# Altium PCB 采集卡.PcbDoc (part 1 of 2)
Units mil, origin at the board's own origin, x right, y up, seen from the top; angles counter-clockwise.
Board outline 5354.33 x 3248.82 mil, 2 copper layers (Top Layer, Bottom Layer); 90 components, 107 nets, 465 pads, 100 vias.
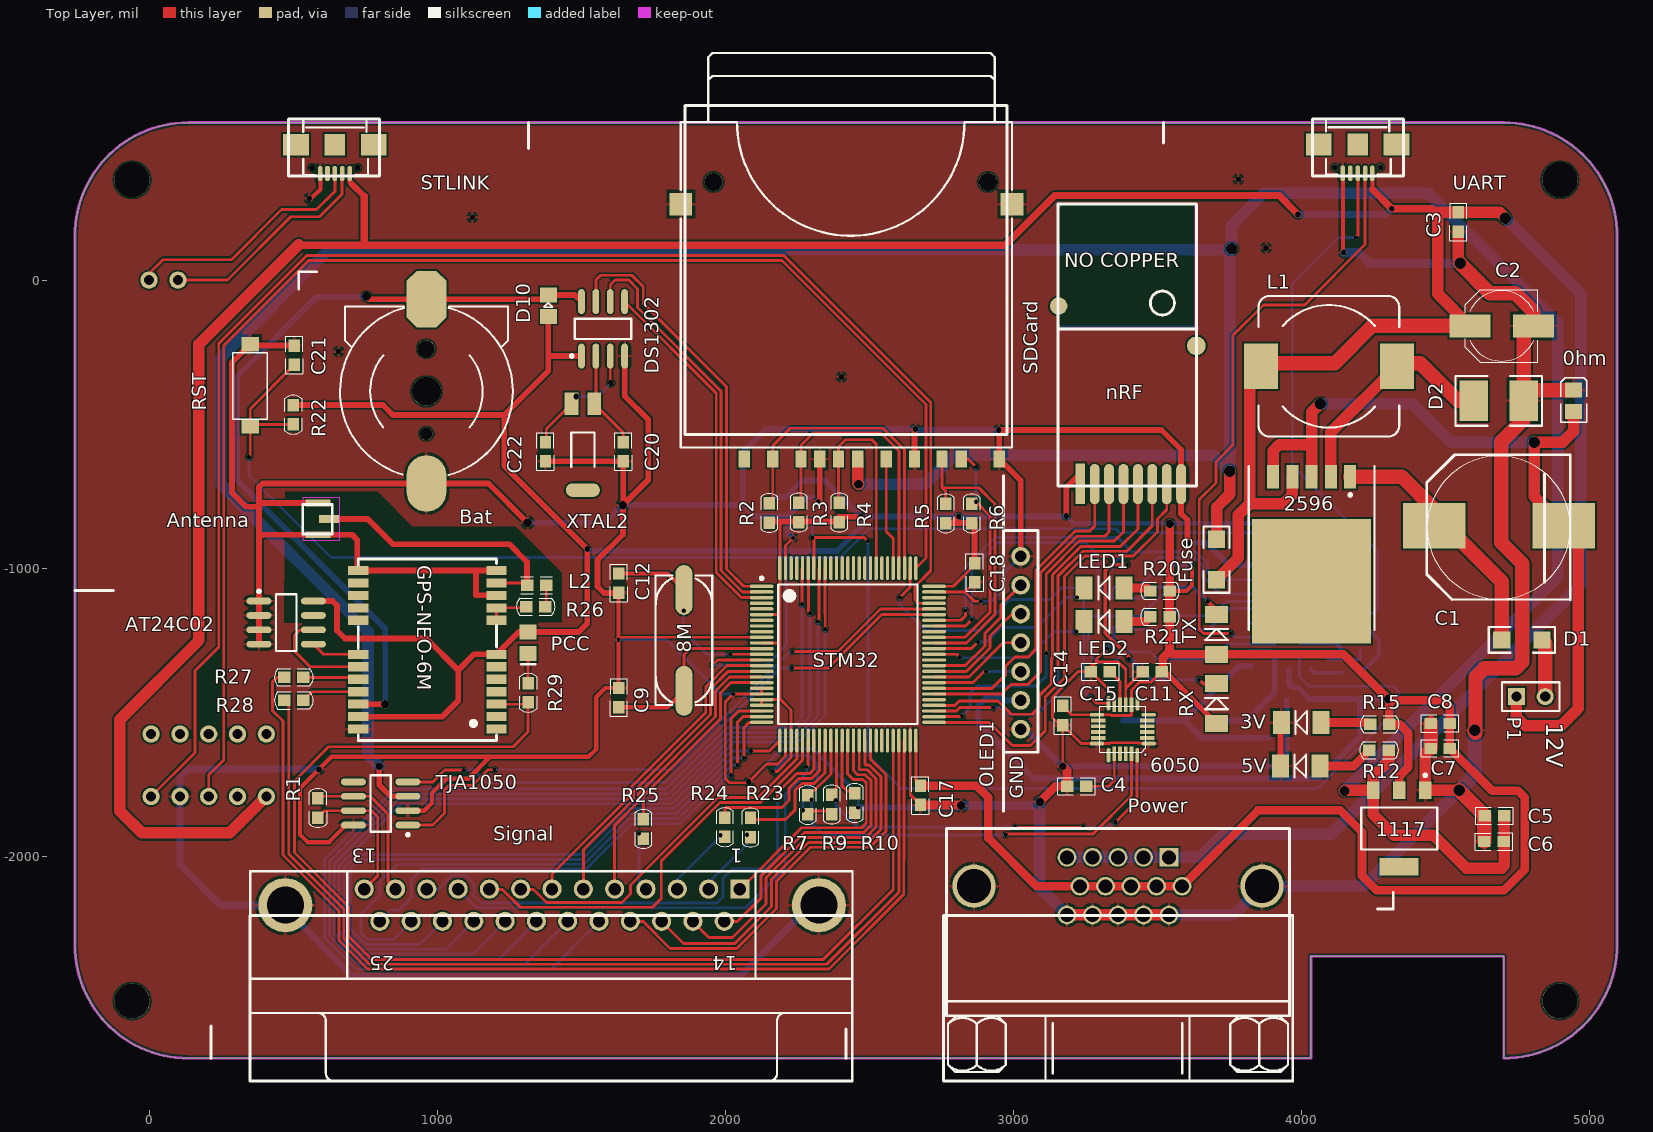
[diagram p0: Top Layer view]
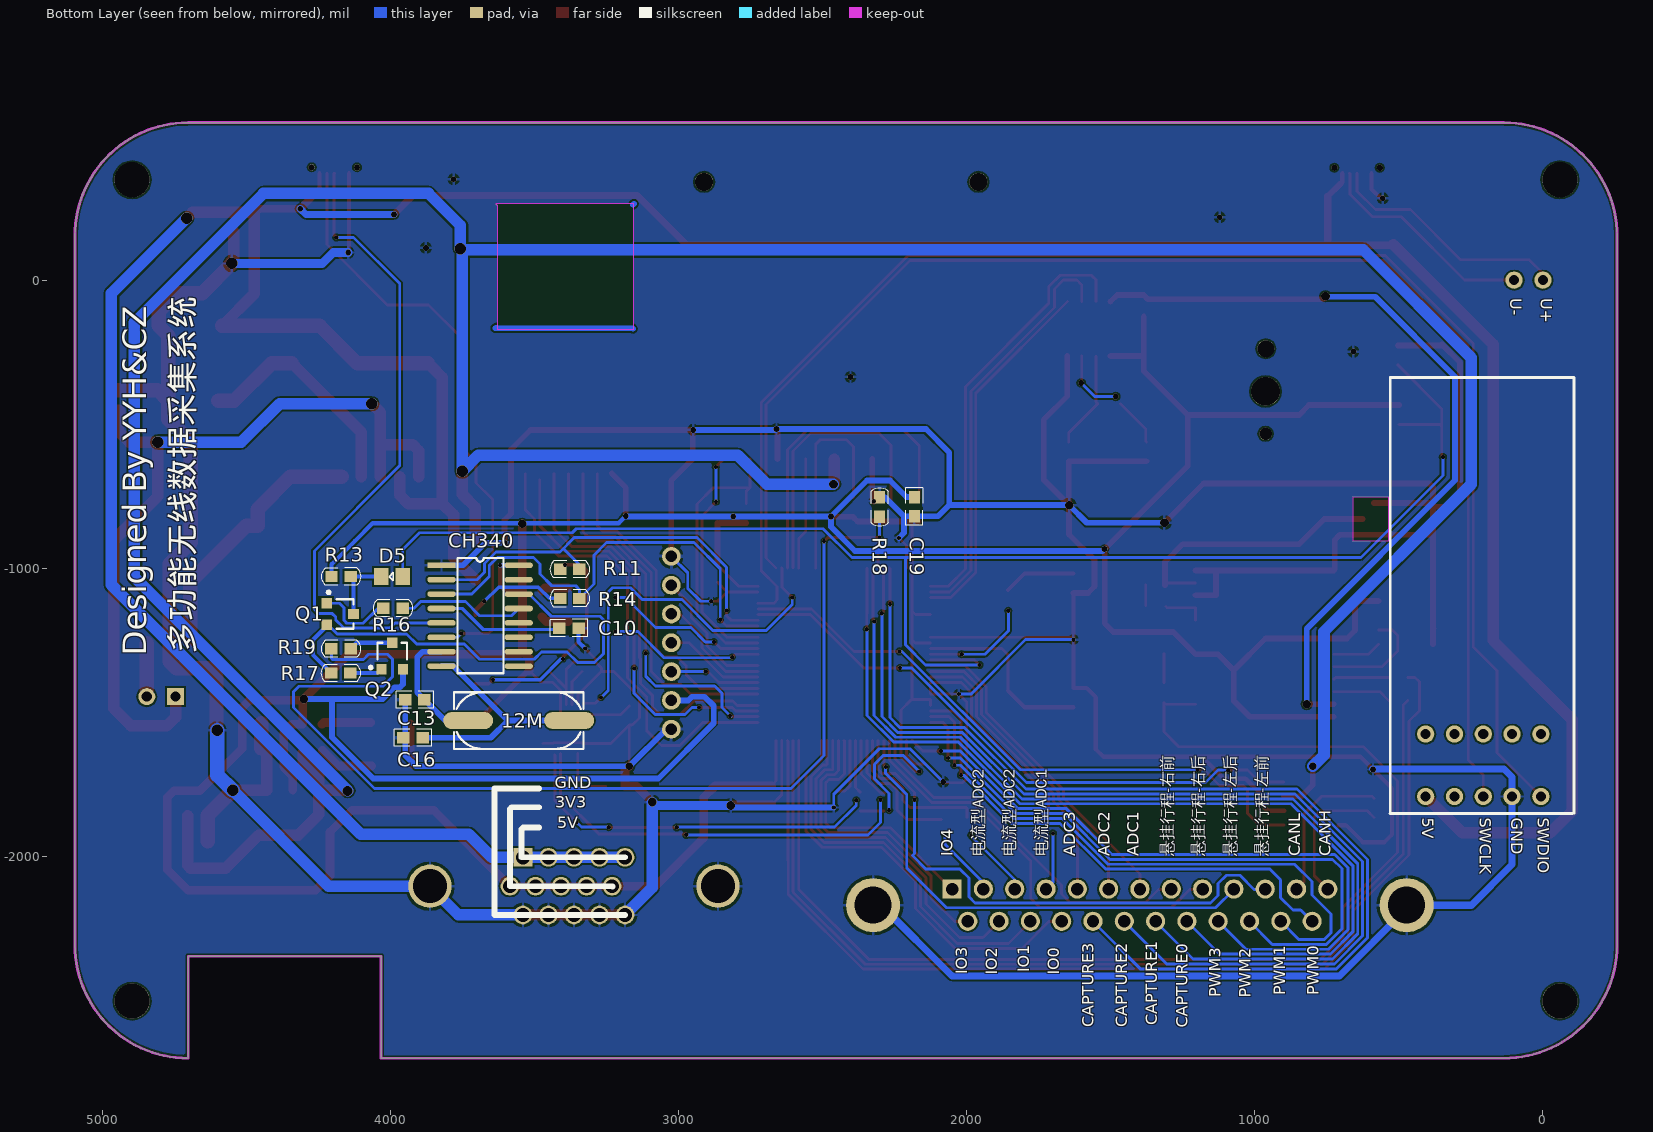
[diagram p1: Bottom Layer view, seen from below]

## Layer stack, top to bottom
Top Solder: solder mask 0.4, Solder Resist, Dk 3.5
Top Layer: signal copper 1.4
Dielectric1: dielectric 12.6, FR-4, Dk 4.8
Bottom Layer: signal copper 1.4
Bottom Solder: solder mask 0.4, Solder Resist, Dk 3.5

## Board outline
-257.61,-2307.95 ccw(c136.09,-2307.95) 136.09,-2701.65 4033.73,-2701.65 4033.73,-2347.32 4703.02,-2347.32 4703.02,-2701.65 ccw(c4703.02,-2307.95) 5096.72,-2307.95 5096.72,153.47 ccw(c4703.02,153.47) 4703.02,547.17 136.09,547.17 ccw(c136.09,153.47) -257.61,153.47

## Design rules (kind name [scope] priority, off if disabled: settings)
Clearance [All] p1: gap=6
ComponentClearance [All] p1: gap=0 collisioncheckmode=3 verticalgap=0 showdistances=FALSE
MinimumSolderMaskSliver [All] p1: minsoldermaskwidth=7
PolygonConnect [All] p1: connectstyle=Relief reliefconductorwidth=10 reliefentries=4 polygonreliefangle="90 Angle" airgapwidth=10
RoutingVias [All] p1: holewidth=28 width=50 viastyle="Through Hole" minholewidth=28 minwidth=25 maxholewidth=28 maxwidth=50
SilkToSolderMaskClearance SilkscreenOverComponentPads [IsPad] p1: minsilkscreentomaskgap=10 clearancetoexposedcopper=TRUE
SolderMaskExpansion [All] p1: expansion=4
Width [All] p1: maxlimit=80 minlimit=8 preferedwidth=25
27 further rules are at their usual default settings.

## Components (designator, comment, footprint, x,y, rotation, side; value= is the part's Value field where it differs from the comment)
0hm "0" 0805-3 4946,-419 r90 top
3V "LED0" DIODE-1206 4069,-1536 r180 top
5V "LED0" DIODE-1206 4066,-1687 r180 top
8M "8M" X-SM49 1857,-1250.69 r90 top
12M "12M" X-SM49 3556,-1529 r180 bottom
1117 "AMS1117" 1117-3.3 4340,-1899 r180 top
2596 "LM2596S-5.0" TO-263-5 4036,-849 r180 top
6050 "MPU6050" QFN24 3466,-1639 r180 top
Antenna "IPX接头" IPX2.6 636,-779 r270 top
AT24C02 "AT24C02" SOIC8_N 476,-1189 r0 top
Bat "Battery" CR1220 963,-386 r180 top
C1 "680uF/35V" C-RB-S12 4686,-859 r0 top
C2 "220uF/16V" C-RB-S6 4696,-159 r0 top
C3 "Cap" CL-0603 4545,235 r270 top
C4 "Cap" CL-0603 3254,-1757 r180 top
C5 "Cap" CL-0603 4638,-1860 r0 top
C6 "Cap" CL-0603 4636,-1949 r0 top
C7 "Cap" CL-0603 4449,-1626 r0 top
C8 "Cap" CL-0603 4516,-1539 r180 top
C9 "22pf" CL-0603 1630,-1416 r270 top
C10 "104" CL-0603 3415,-1208 r180 bottom
C11 "Cap" CL-0603 3516,-1359 r180 top
C12 "22pf" CL-0603 1631,-1085.38 r90 top
C13 "Cap" CL-0603 3883,-1457 r0 bottom
C14 "Cap" CL-0603 3172,-1478 r270 top
C15 "Cap" CL-0603 3336,-1359 r180 top
C16 "Cap" CL-0603 3889,-1589 r0 bottom
C17 "104" CL-0603 2678,-1822 r90 top
C18 "104" CL-0603 2866,-1049 r90 top
C19 "104" CL-0603 2182,-820 r90 bottom
C20 "6pf" CL-0603 1646,-629 r90 top
C21 "Cap" CL-0603 504,-294 r90 top
C22 "6pf" CL-0603 1376,-629 r90 top
CH340 "CH340G" SOP16 3823.72,-990 r180 bottom
D1 "1N4007" 1206 4766,-1249 r180 top
D2 "1N5824" 1812 4686,-419 r180 top
D5 "1n4148" 0805-2 3996,-1029 r0 bottom
D10 "1n4148" 0805-2 1386,-89 r90 top
DS1302 "DS1302" SOIC8_N 1576,-169 r90 top
Fuse "自恢复保险丝" 1206 3706,-970 r90 top
GPS-NEO-6M "NEO-6M" NEO-6M 1206,-1299 r270 top
L1 "Inductor" L-SMD-12 4096,-299 r180 top
L2 "Inductor" 0603电感 1346,-1059 r180 top
LED1 "LED0" DIODE-1206 3384,-1069 r180 top
LED2 "LED0" DIODE-1206 3384,-1185 r180 top
nRF "nRF24l01贴片" NRF24L01贴片 3636,265 r90 top
OLED1 "OLED-Freescale" OLED-FREESCALE 3026,-1259 r90 top
P1 "电源插头" HDR2X1_A 4747,-1446 r0 top
PCC "LED0" LED_0805 1316,-1259 r270 top
Power "Power" DB15-F 3364,-2204 r270 top
Q1 "SS8050" SOT-23 4176,-1159 r270 bottom
Q2 "SS8550" SOT-23 3995,-1305 r180 bottom
R1 "Res2" 8-RL-0603 586,-1799 r270 top
R2 "Res2" 8-RL-0603 2153,-842 r90 top
R3 "Res2" 8-RL-0603 2256,-840.32 r90 top
R4 "Res2" 8-RL-0603 2396,-840.32 r90 top
R5 "Res2" 8-RL-0603 2766,-843.32 r90 top
R6 "Res2" 8-RL-0603 2856,-843.32 r90 top
R7 "10K" 8-RL-0603 2287,-1855 r90 top
R9 "10K" 8-RL-0603 2370,-1854 r90 top
R10 "10K" 8-RL-0603 2450,-1849 r90 top
R11 "472" 8-RL-0603 3344.9,-1004 r0 bottom
R12 "Res2" 8-RL-0603 4237,-1632 r0 top
R13 "10K" 8-RL-0603 4205.82,-1029 r180 bottom
R14 "472" 8-RL-0603 3344.9,-1105 r0 bottom
R15 "Res2" 8-RL-0603 4239,-1542 r0 top
R16 "Res1" 8-RL-0603 4025.82,-1139 r180 bottom
R17 "Res1" 8-RL-0603 4140,-1364 r0 bottom
R18 "10K" 8-RL-0603 2303,-754 r270 bottom
R19 "Res1" 8-RL-0603 4206,-1280 r180 bottom
R20 "Res2" 8-RL-0603 3476,-1079 r0 top
R21 "Res2" 8-RL-0603 3476,-1169 r0 top
R22 "Res2" 8-RL-0603 500,-433.68 r270 top
R23 "Res1" 8-RL-0603 2088,-1934 r90 top
R24 "Res1" 8-RL-0603 1999,-1933 r90 top
R25 "Res1" 8-RL-0603 1716,-1939 r90 top
R26 "10" 8-RL-0603 1376,-1133.5 r180 top
R27 "51R" 8-RL-0603 536,-1379 r180 top
R28 "51R" 8-RL-0603 536,-1459 r180 top
R29 "1K" 8-RL-0603 1316,-1399 r270 top
RST "复位" 6X3MM微动 351,-222.5 r270 top
RX "LED0" DIODE-1206 3706,-1539 r90 top
SDCard "SDCARD-M" SDCARD_B 2436,-586 r90 top
Signal "信号" DSUB1.385-2H25A 1399,-2544 r180 top
STLINK "USB_M" USB_MICRO 745,420 r180 top
STM32 "STM32F103VBT6" LQFP100_M 2426,-1299 r0 top
TJA1050 "TJA1050" SOIC8_N 804,-1817 r180 top
TX "LED0" DIODE-1206 3706,-1299 r90 top
UART "USB_M" USB_MICRO 4296,421 r180 top
XTAL2 "32.768K" X-TC15 1506,-429 r0 top

## Footprints (in the part's own frame and the unit in brackets; to place one, negate y for a bottom-side part, rotate by r counter-clockwise, add the part's x,y. Pads: shape width x height; smd on the part's side, far side on the other; paste and mask are expansions set on the pad)
6X3MM微动 [mil]
  rect 50x60 smd: 1(0,0) 2(285,0)
  silkscreen extent 30,-60 260,60
8-RL-0603 [mm]
  rect 1.1x1 smd: 1(0,0) 2(1.7,0)
  silkscreen extent -0.86,-0.75 2.56,0.76
0603电感 [mm]
  rect 1.1x1 smd: 1(-0.839,0) 2(0.861,0)
  silkscreen extent -1.39,-0.75 1.41,0.76
0805-2 [mm] "贴片无丝印"
  rect 1.3x1.5 smd: 1(-0.95,0) 2(0.95,0)
  silkscreen extent -0.13,-0.38 0.25,0.38
0805-3 [mm] "贴片无丝印"
  rect 1.3x1.5 smd: 1(-0.95,0) 2(0.95,0)
  silkscreen extent -1.91,-1.14 2.03,1.14
1117-3.3 [mm]
  rect 1.1x1.55 smd: 1(-2.3,-3.248) 2(0,-3.248) 3(2.3,-3.248)
  rect 3.45x1.55 smd: 4(0,3.502)
  silkscreen extent -3.35,-4.7 3.35,1.98, body extent -3.3,-1.65 3.3,1.91, height 1.8
1206 [mil] "贴片元件"
  rect 60x60 smd: 1(-70,0) 2(70,0)
  silkscreen extent -115,-45 115,45, body extent -75,-35 75,35, height 39
1812 [mm] "保险丝"
  rect 2.5x3.6 smd: 1(-2.2,0) 2(2.2,0)
  silkscreen extent -3.81,-2.2 3.81,2.2, body extent -2.54,-1.65 2.67,1.65, height 1.2
C-RB-S6 [mm] "贴片电解"
  rect 3.6x2 smd: 1(-2.794,0) 2(2.794,0)
  silkscreen extent -3.2,-3.2 3.2,3.2, body extent -3.15,-3.12 3.15,3.17, height 7.7
C-RB-S12 [mm]
  rect 5.5x4 smd: 1(-5.69,0.152) 2(5.715,0.152)
  silkscreen extent -6.35,-6.35 6.3,6.43, body extent -6.32,-6.32 6.27,6.27, height 13
CL-0603 [mm]
  rect 1.1x1 smd: 1(0,0) 2(1.7,0)
  silkscreen extent -0.8,-0.75 2.5,0.76
CR1220 [mm] "钮扣电池"
  round 1.1 hole 1.1: 0(0,3.75)
  round 2.54 hole 2.54: 0(0,0)
  round 1.5 hole 1.5: 0(0.025,-3.75)
  oct 3.5x5 smd: 1(0,-8.128)
  oval 3.5x5 smd: 2(0,8.128)
  silkscreen extent -7.62,-7.5 7.62,7.36, body extent -6.99,-7 7,7, height 4
DB15-F [mil] "VGAĸ"
  rect 65x65 hole 48: 1(-200,177.16)
  round 65 hole 48: 2(-200,88.58) 3(-200,0) 4(-200,-88.58) 5(-200,-177.16) 6(-100,222.17) 7(-100,133.58) 8(-100,45) 9(-100,-43.58) 10(-100,-132.16) 11(0,177.16) 12(0,88.58) 13(0,0) 14(0,-88.58) 15(0,-177.16)
  round 150 hole 118.11: 16(-100,500) 17(-100,-500)
  silkscreen extent -300,-595 575,596, body extent -300,-595 350,595, height 494
DIODE-1206 [mm] "玻璃封装二极管"
  rect 1.5x2 smd: 1(0,0) 2(3.5,0)
  silkscreen extent 1.25,-1 2.25,1
DSUB1.385-2H25A [mm] "Connector; D Subminiature; 25 Position; Right Angle; Pitch 1.385 mm"
  rect 1.69x1.69 hole 1.09: 1(-16.566,-10.92)
  round 1.69 hole 1.09: 2(-13.805,-10.92) 3(-11.044,-10.92) 4(-8.283,-10.92) 5(-5.522,-10.92) 6(-2.761,-10.92) 7(0,-10.92) 8(2.761,-10.92) 9(5.522,-10.92) 10(8.283,-10.92) 11(11.044,-10.92) 12(13.805,-10.92) 13(16.566,-10.92) 14(-15.185,-8.08) 15(-12.424,-8.08) 16(-9.663,-8.08) 17(-6.902,-8.08) 18(-4.141,-8.08) 19(-1.38,-8.08) 20(1.381,-8.08) 21(4.142,-8.08) 22(6.903,-8.08) 23(9.664,-8.08) 24(12.425,-8.08) 25(15.186,-8.08)
  round 4.76 hole 3.26: 26(-23.526,-9.5) 27(23.526,-9.5)
  silkscreen extent -26.5,-12.5 26.6,6
HDR2X1_A [mm] "Connector; Header; 2 Position"
  rect 1.5x1.5 hole 0.9: 1(0,0)
  round 1.5 hole 0.9: 2(2.54,0)
  silkscreen extent -1.27,-1.27 3.81,1.27
IPX2.6 [mm]
  rect 0.7x1.8 smd: 1(1.27,-0.254)
  rect 0.6x2.2 smd: 2(-0.127,-1.27) 3(2.667,-1.27)
  Keep-Out Layer pour cut-out: -0.635,0.635 3.175,0.635 3.175,-2.54 -0.635,-2.54
  silkscreen extent 0,-2.6 2.6,0, body extent -0.03,-2.57 2.57,0.03, height 1.25
L-SMD-12 [mm] "贴片电感12*12"
  rect 3x4 smd: 1(-6,0) 2(6,0)
  silkscreen extent -6.2,-6.2 6.2,6.2, body extent -6.21,-6.23 6.21,6.18, height 2.5
LED_0805 [mm] "贴片二极管"
  rect 1.3x1.5 smd: 1(-0.95,0) 2(0.95,0)
  silkscreen extent 1.91,-0.63 1.91,0.64
LQFP100_M [mm]
  oval 2.1x0.3 smd: 1(-7.6,6) 2(-7.6,5.5) 3(-7.6,5) 4(-7.6,4.5) 5(-7.6,4) 6(-7.6,3.5) 7(-7.6,3) 8(-7.6,2.5) 9(-7.6,2) 10(-7.6,1.5) 11(-7.6,1) 12(-7.6,0.5) 13(-7.6,0) 14(-7.6,-0.5) 15(-7.6,-1) 16(-7.6,-1.5) 17(-7.6,-2) 18(-7.6,-2.5) 19(-7.6,-3) 20(-7.6,-3.5) 21(-7.6,-4) 22(-7.6,-4.5) 23(-7.6,-5) 24(-7.6,-5.5) 25(-7.6,-6) 51(7.6,-6) 52(7.6,-5.5) 53(7.6,-5) 54(7.6,-4.5) 55(7.6,-4) 56(7.6,-3.5) 57(7.6,-3) 58(7.6,-2.5) 59(7.6,-2) 60(7.6,-1.5) 61(7.6,-1) 62(7.6,-0.5) 63(7.6,0) 64(7.6,0.5) 65(7.6,1) 66(7.6,1.5) 67(7.6,2) 68(7.6,2.5) 69(7.6,3) 70(7.6,3.5) 71(7.6,4) 72(7.6,4.5) 73(7.6,5) 74(7.6,5.5) 75(7.6,6)
  oval 0.3x2.1 smd: 26(-6,-7.6) 27(-5.5,-7.6) 28(-5,-7.6) 29(-4.5,-7.6) 30(-4,-7.6) 31(-3.5,-7.6) 32(-3,-7.6) 33(-2.5,-7.6) 34(-2,-7.6) 35(-1.5,-7.6) 36(-1,-7.6) 37(-0.5,-7.6) 38(0,-7.6) 39(0.5,-7.6) 40(1,-7.6) 41(1.5,-7.6) 42(2,-7.6) 43(2.5,-7.6) 44(3,-7.6) 45(3.5,-7.6) 46(4,-7.6) 47(4.5,-7.6) 48(5,-7.6) 49(5.5,-7.6) 50(6,-7.6) 76(6,7.6) 77(5.5,7.6) 78(5,7.6) 79(4.5,7.6) 80(4,7.6) 81(3.5,7.6) 82(3,7.6) 83(2.5,7.6) 84(2,7.6) 85(1.5,7.6) 86(1,7.6) 87(0.5,7.6) 88(0,7.6) 89(-0.5,7.6) 90(-1,7.6) 91(-1.5,7.6) 92(-2,7.6) 93(-2.5,7.6) 94(-3,7.6) 95(-3.5,7.6) 96(-4,7.6) 97(-4.5,7.6) 98(-5,7.6) 99(-5.5,7.6) 100(-6,7.6)
  silkscreen extent -7.72,-6.15 6.15,6.82
NEO-6M [mm]
  rect 0.8x1.8 smd: 1(6.6,0) 2(5.5,0) 3(4.4,0) 4(3.3,0) 5(2.2,0) 6(1.1,0) 7(0,0) 8(-3,0) 9(-4.1,0) 10(-5.2,0) 11(-6.3,0) 12(-7.4,0) 13(-7.4,-12.192) 14(-6.3,-12.192) 15(-5.2,-12.192) 16(-4.1,-12.192) 17(-3,-12.192) 18(0,-12.192) 19(1.1,-12.192) 20(2.2,-12.192) 21(3.3,-12.192) 22(4.4,-12.192) 23(5.5,-12.192) 24(6.6,-12.192)
  silkscreen extent -8.4,-12.19 7.6,0.01, body extent -8.38,-12.19 7.62,0, height 2.2
NRF24L01贴片 [mil] "贴片，双天线"
  rect 140x34 smd: 1(-971.82,403.23)
  oval 140x34 smd: 2(-973,353) 3(-973,303) 4(-973,253) 5(-973,203) 6(-973,153) 7(-973,103) 8(-973,53)
  round 60 smd: 10(-355,478)
  round 65 smd: 11(-493,0)
  Keep-Out Layer pour cut-out: -435,480 0,480 0,0 -5,5 -435,5
  silkscreen extent -980,0 0,480, body extent -980,0 0,480, height 87
OLED-FREESCALE [mil]
  round 65 hole 40: 1(-300,0) 2(-200,0) 3(-100,0) 4(0,0) 5(100,0) 6(200,0) 7(300,0)
  silkscreen extent -585,-60 580,60
QFN24 [mil]
  oct 50x13 smd: 1(-5,-30)
  rect 50x13.39 smd: 2(0,-50) 3(0,-70) 4(0,-90) 5(0,-110) 14(170,-110) 15(170,-90) 16(170,-70) 17(170,-50)
  oct 50x13.39 smd: 6(-5,-130) 13(175,-130) 18(175,-30)
  oct 13.39x50 smd: 7(35,-170) 12(135,-170) 19(135,10)
  rect 13.39x50 smd: 8(55,-165) 9(75,-165) 10(95,-165) 11(115,-165) 20(115,5) 21(95,5) 22(75,5) 23(55,5)
  oct 13x50 smd: 24(35,10)
  silkscreen extent 5,-160 165,0, body extent 5,-160 165,0, height 71
SDCARD_B [mm] "SD卡自弹"
  rect 1.5x1 smd: 1(-0.889,6.88) 2(-0.889,4.38) 3(-0.889,1.08) 4(-0.889,-0.63) 5(-0.889,-3.13) 6(-0.889,-5.63) 7(-0.889,-8.05) 8(-0.889,-9.75) 9(-0.889,9.38) 10(-0.889,2.73) 11(-0.889,-13.1)
  rect 2x2 smd: 12(21.59,-14.224) 13(21.59,14.986)
  round 1.6 hole 1.6: ""(23.55,-12.1) ""(23.55,12.1)
  silkscreen extent 0.13,-14.22 34.92,14.99, body extent 0.13,-14.22 28.91,15.04, height 2.7
SOIC8_N [mm] "8-Pin Small Outline Integrated Circuit Package (SOIC8), IPC Medium Density"
  oval 2.2x0.6 smd: 1(-2.4,1.905) 2(-2.4,0.635) 3(-2.4,-0.635) 4(-2.4,-1.905) 5(2.4,-1.905) 6(2.4,-0.635) 7(2.4,0.635) 8(2.4,1.905)
  silkscreen extent -2.52,-2.5 0.9,2.88, body extent -1.95,-2.45 1.95,2.45, height 1.75
SOP16 [mm]
  rect 2.5x0.5 smd: 1(0,0)
  oval 2.5x0.5 smd: 2(0,-1.27) 3(0,-2.54) 4(0,-3.81) 5(0,-5.08) 6(0,-6.35) 7(0,-7.62) 8(0,-8.89) 9(6.8,-8.89) 10(6.8,-7.62) 11(6.8,-6.35) 12(6.8,-5.08) 13(6.8,-3.81) 14(6.8,-2.54) 15(6.8,-1.27) 16(6.8,0)
  silkscreen extent 1.4,-9.53 5.46,0.63, body extent 0,-9.53 6.86,0.76, height 1.75
SOT-23 [mm]
  rect 0.9x0.95 smd: 1(-0.95,-1.175) 2(0.95,-1.175) 3(0,1.175)
  silkscreen extent -2.03,-1.14 1.3,1.18
TO-263-5 [mm] "贴片LM2596"
  rect 1.05x2.1 smd: 1(-3.4,-4.225) 2(-1.7,-4.225) 3(0,-4.225) 4(1.7,-4.225) 5(3.4,-4.225)
  rect 10.5x11 smd: 6(0,4.987)
  silkscreen extent -5.55,-5.18 5.55,9.28, body extent -5.33,-4.7 5.33,10.29, height 3
USB_MICRO [mm] "USB方孔"
  oct 0.4x1.35 smd: 1(1.24,1.27) 2(1.89,1.27) 3(2.54,1.27) 4(3.19,1.27) 5(3.84,1.27)
  rect 2.286x1.9 smd: 6(5.969,-1.27) 7(-0.889,-1.27)
  rect 1.8x1.9 smd: 8(2.54,-1.27)
  round 0.54 hole 0.54: ""(0.54,0.753) ""(4.54,0.753)
  silkscreen extent -0.38,-3.56 5.33,1.4
X-SM49 [mm]
  oval 4.4x1.5 smd: 1(4.45,0.004) 2(-4.45,-0.004)
  silkscreen extent -5.7,-2.5 5.72,2.5, body extent -5.71,-2.54 5.71,2.54, height 4
X-TC15 [mm] "圆柱晶振1"
  rect 1.2x2 smd: 1(-1,0) 2(1,0)
  oval 3x1.2 smd: 3(0,-7.62)
  silkscreen extent -1.02,-5.59 1.02,-2.54, body extent -1,-8.29 1,0, height 1.99

## Part data
0hm R13: library part Res1, "Resistor"
3V 5V LED1 LED2 PCC RX TX: "Typical INFRARED GaAs LED"
8M XTAL2: library part 晶振
12M: library part XTAL, "Crystal Oscillator"
2596: "5V稳压芯片"
AT24C02: "EEROM存储器"
Bat: "备份电池"
C1 C2: library part "Cap Pol", "极性电解电容"
C3 C4 C5 C6 C7 C8 C11 C14 C15 C21: "Capacitor"
C9 C12 C17 C18 C19 C20 C22: library part CAP, "Capacitor"
C10: library part CAP
C13 C16: "无极性电容"
D1: library part "Diode 1N4007", "1 Amp General Purpose Rectifier"
D2: library part "D Schottky", "Schottky Diode"
D5 D10: library part Diode, "二极管"
Fuse: library part "Fuse 2", "保险丝"
P1: library part "Header 2", "Header, 2-Pin"
Power: library part "D Connector 15", "VGA"
Q1: "NPN贴片三极管"
Q2: "PNP贴片三极管"
R1 R2 R3 R4 R5 R6 R12 R15 R16 R17 R19 R20 R21 R22: "Resistor"
R7 R9 R10 R11 R14 R18 R26 R27 R28 R29: library part RES
R23 R24 R25: "贴片电阻"
RST: library part SW-PB, "Switch"
SDCard: "TF卡槽"
Signal: library part "D Connector 25", "Receptacle Assembly, 25 Position, Right Angle"
STLINK UART: "MicroUSB接口"
STM32: "STM32 ARM-based 32-bit MCU with 64 Kbytes Flash, 100-pin LQFP, Industrial Temperature"
TJA1050: "CAN总线收发器"

## Free pads (board coordinates)
  round 60 hole 35: 1(407,-1792.54) 2(307,-1792.54) 3(207,-1792.54) 4(107,-1792.54) 5(7,-1792.54) 6(407,-1576) 7(307,-1576) 8(207,-1576) 9(107,-1576) 10(7,-1576) U+(0,0) U-(100,0)
  round 122.05 hole 122.05: ""(-58.76,-2502.82) ""(-58.76,348.36) ""(4897.89,-2502.82) ""(4897.89,348.36)

## Via types
v1: diameter 15, hole 15, Top Layer to Bottom Layer, 60 vias
v2: diameter 20, hole 20, Top Layer to Bottom Layer, 20 vias
v3: diameter 30, hole 30, Top Layer to Bottom Layer, 9 vias
v4: diameter 40, hole 40, Top Layer to Bottom Layer, 8 vias
v5: diameter 25, hole 25, Top Layer to Bottom Layer, 2 vias
v6: diameter 35, hole 35, Top Layer to Bottom Layer, 1 vias

## Nets (pads, with @x,y where several pads share a name; then routed paths per layer and width w, separated by ;. In a path a pad name is that pad's centre, name@x,y a point inside that pad or via, vN(x,y) a via of type N, cw(c..) or ccw(c..) an arc to the next point about the centre after c; other vN are vias at no path point)
3V3: 1117.2 6050.8 6050.13 AT24C02.8 C7.2 C8.1 C11.1 C14.1 C17.2 C18.2 C19.2 CH340.16 D10.1 DS1302.1 GPS-NEO-6M.7 GPS-NEO-6M.23 nRF.1 OLED1.2 PCC.1 Power.6 Power.7 Power.8 Power.9 Power.10 Q2.2 R2.1 R3.1 R4.1 R5.1 R6.1 R7.1 R9.1 R13.1 R15.2 R20.2 R21.2 R22.1 RX.1 STM32.6 STM32.11 STM32.21 STM32.22 STM32.28 STM32.50 STM32.75 STM32.100 TX.1 | length 18196.6
  Top Layer w10: STM32.22@2126.79,-1476.17 STM32.21@2126.79,-1456.48 2193,-1456.48 ; STM32.11@2126.79,-1259.63 2180.37,-1259.63 2189.78,-1250.22 ; STM32.6@2126.79,-1161.2 2178.8,-1161.2 2189.78,-1150.22 ; v1(2165,-1706) 2180.96,-1706 2229.15,-1657.81 STM32.28@2229.15,-1598.21 2229.15,-1492.63 2193,-1456.48 ; 2189.78,-843 STM32.100@2189.78,-999.79 2189.78,-1150.22 ; R7.1@2288,-1843 R9.1@2370,-1843 ; STM32.50@2662.22,-1598.21 2662.22,-1739.29 C17.2@2678,-1755.07 ; STM32.75@2725.21,-1062.78 2792.22,-1062.78 2866,-989 C18.2@2866,-982.07 ; C14.1@3172,-1478 3203,-1509 6050.13@3291,-1509 3337.34,-1509 3339.34,-1511 3410,-1511 3411,-1510 6050.8@3411,-1474 3411,-1424 3439,-1396 3479,-1396 C11.1@3516,-1359 ; 2189.78,-1250.22 2189.78,-1150.22 ; 2189.78,-1250.22 2189.78,-1453.26 2193,-1456.48
  Top Layer w15: R20.2@3542.93,-1079 3602,-1079 3621,-1060 v1(3621,-990)
  Top Layer w20: R22.1@500,-433.68 811.68,-433.68 846,-468 1233,-468 ; AT24C02.8@570.49,-1114 637,-1114 652,-1129 652,-1216 680,-1244 963,-1244 1073,-1354 ; GPS-NEO-6M.23@726,-1515.53 1017.47,-1515.53 1073,-1460 1073,-1354 ; D10.1@1386,-126.4 1386,-259 ; DS1302.1@1501,-263.49 1390.49,-263.49 1386,-259 ; R2.1@2168,-838 2379.32,-838 2396,-821.32 v2@2471.68,-821.32 ; R5.1@2766,-843.32 2789,-843.32 ; v2@2811,-821.32 2789,-843.32 ; R6.1@2856,-843.32 2789,-843.32 ; C18.2@2866,-982.07 R6.1@2866,-843.32 ; v2(3184,-819) 3184,-719.59 nRF.1@3232.77,-670.82 ; C11.1@3516,-1359 3526,-1359 RX.1@3706,-1539 ; 1073,-1354 1128,-1299 GPS-NEO-6M.7@1206,-1299 1283.4,-1221.6 PCC.1@1316,-1221.6 1491.4,-1221.6 1521,-1192 1521,-933 1233,-645 1233,-468 ; 1233,-468 1386,-315 1386,-259
  Top Layer w30: C17.2@2678,-1755.07 2873.07,-1755.07 2914,-1796 2914,-1937 3081,-2104 3587.17,-2104 3850.17,-1841 4136,-1841 4211,-1916 4211,-2068 4261,-2118 4704,-2118 4776,-2046 4776,-1796 4753,-1773 4662.93,-1773 C7.2@4515.93,-1626 4515.93,-1483.93 4489.93,-1457.93 v3@4305.93,-1457.93 ; C11.1@3519,-1356 3519,-1311.93 3542.93,-1288 ; v3(3544,-846) 3544,-1075.93 3545,-1076.93 R20.2@3542.93,-1079 R21.2@3542.93,-1169 3542.93,-1288 ; 1117.2@4340,-1771.13 4340,-1723 4372,-1691 4372,-1572 4342,-1542 R15.2@4305.93,-1542 v3@4305.93,-1457.93 ; 3542.93,-1288 3553.93,-1299 TX.1@3706,-1299 4147,-1299 v3(4302,-1454) v3@4305.93,-1457.93
  Bottom Layer w10: v1(2165,-1706) 2220,-1651 2291,-1651 2321,-1681 2321,-1731 2270,-1782 v1(2270,-1840)
  Bottom Layer w15: v2(3184,-819) 3208.5,-843.5 4062.36,-843.5 4122.93,-904.07 4123,-904 4205.82,-986.82 R13.1@4205.82,-1029 ; CH340.16@3556,-990 v1(3621,-990)
  Bottom Layer w20: v2(1522,-933) 1529,-940 2388,-940 2472,-856 v2(2472,-821) ; C19.2@2182,-753.07 2209.93,-753.07 2267,-696 2347,-696 v2(2472,-821) ; OLED1.2@3026,-1459 2967,-1459 2954,-1446 2911,-1446 2879,-1478 2879,-1538 3071,-1730 4060.89,-1730 4204,-1586.89 4204,-1454 ; v2(3184,-819) 3182,-821 v2(2811,-821) v2(2472,-821) ; Q2.2@3957.6,-1351.26 3957.6,-1402.6 3968,-1413 3987,-1413 4028,-1454 4204,-1454 ; v3(4302,-1454) 4204,-1454
5V: 1117.3 C5.2 C6.2 Fuse.2 R12.2 SDCard.4 TJA1050.3 | length 12386.9
  Top Layer w20: v5(799,-1688) 799,-1753 838,-1792 TJA1050.3@898.49,-1792
  Top Layer w40: SDCard.4@2460.8,-621 2460.8,-705.8 v3(2463,-708) ; Fuse.2@3706,-900 3706,-789.25 3752,-743.25 v4(3752,-663) ; v6(4150,-1773) 4151.87,-1771.13 1117.3@4249.45,-1771.13 ; R12.2@4303.93,-1640 4303.93,-1669.07 4249.45,-1723.55 1117.3@4249.45,-1771.13 ; C5.2@4704.93,-1860 4704.93,-2032.07 4696,-2041 4573,-2041 4459,-1927 4322,-1927 4249.45,-1854.45 1117.3@4249.45,-1771.13
  Bottom Layer w40: v5(799,-1688) 760,-1649 760,-1220 249,-709 249,-269 623,105 3754,105 v4(3758,109) ; v3(2463,-708) 2695,-708 2795,-608 3697,-608 v4(3752,-663) 3752,103 v4(3758,109) ; v6@4149,-1772 4890,-1031 4890,-147 4442,301 3869,301 3758,190 v4(3758,109)
ADC1: Signal.7 STM32.15 | length 1148.6
  Top Layer w10: Signal.7@1399,-2115.08 1399,-2061.88 1665,-1795.88 1665,-1768.88 1932.5,-1501.38 1932.5,-1412.38 2006.51,-1338.37 STM32.15@2126.79,-1338.37
ADC2: Signal.6 STM32.16 | length 1081.4
  Top Layer w10: Signal.6@1507.7,-2115.08 1507.7,-1977.22 1682,-1802.92 1682,-1775.92 1949.5,-1508.42 1949.5,-1419.42 2010.86,-1358.06 STM32.16@2126.79,-1358.06
ADC3: Signal.5 STM32.17 | length 1014.1
  Top Layer w10: Signal.5@1616.4,-2115.08 1616.4,-1892.56 1699,-1809.96 1699,-1782.96 1966.5,-1515.46 1966.5,-1426.46 2015.22,-1377.74 STM32.17@2126.79,-1377.74
ADC4: R25.2 STM32.18 | length 687.6
  Top Layer w10: R25.2@1716,-1852.07 1716,-1790 1983.5,-1522.5 1983.5,-1433.5 2019.57,-1397.43 STM32.18@2126.79,-1397.43
ADC5: R24.2 STM32.33 | length 545.3
  Top Layer w10: R24.2@1999,-1866.07 1999,-1833 2001.64,-1830.36 2197.64,-1830.36 2221.86,-1806.14 2221.86,-1763.86 2255.3,-1730.42 2300.58,-1730.42 2327.57,-1703.43 STM32.33@2327.57,-1598.21
ADC6: R23.2 STM32.34 | length 477.9
  Top Layer w10: R23.2@2088,-1872.07 2209.93,-1872.07 2241.88,-1840.12 2241.88,-1772.12 2266.58,-1747.42 2309.58,-1747.42 2347.26,-1709.74 STM32.34@2347.26,-1598.21
AGND: 0hm.1 2596.3 2596.5 C1.2 P1.1 | length 2829
  Top Layer w40: 2596.5@3902.14,-682.66 3902.14,-592.86 3924.17,-570.83 4036,-570.83 ; 2596.3@4036,-682.66 4036,-570.83 ; v4(4066,-429) 4036,-459 4036,-570.83 ; P1.1@4747,-1446 4747,-1517 4777,-1547 4902,-1547 4962,-1487 4962,-904 C1.2@4911,-853 4809,-751 v4(4809,-562) 4908,-562 4946,-524 0hm.1@4946,-474
  Top Layer w50: 0hm.1@4946,-474 0hm.1@4946,-456.4
  Bottom Layer w40: v4(4066,-429) 4386,-429 4519,-562 v4(4809,-562)
BT0: R18.2 R19.1 STM32.94 | length 3872.6
  Top Layer w10: STM32.94@2307.89,-999.79 2307.89,-898.89 v1(2303,-894) 2483,-894 v1(2496,-907)
  Bottom Layer w10: v1(2303,-894) R18.2@2303,-820.93 ; v1(2496,-907) 2496,-1650 2495.5,-1650.5 2610,-1765 4057,-1765 4338,-1484 4338,-1429 4319,-1410 4027,-1410 3994,-1377 3994,-1316 4011,-1299 4077,-1299 4095,-1317 4203,-1317 4206,-1314 R19.1@4206,-1280
C_ADC1: R25.1 Signal.4 | length 204.1
  Bottom Layer w10: v1(1701,-1921) 1701,-2090.98 Signal.4@1725.1,-2115.08
C_ADC2: R24.1 Signal.3 | length 264.2
  Bottom Layer w10: Signal.3@1833.8,-2115.08 1817,-2098.28 1984,-1931.28 v1(1984,-1927)
C_ADC3: R23.1 Signal.2 | length 254.9
  Bottom Layer w10: Signal.2@1942.5,-2115.08 1931,-2103.57 2076,-1958.57 v1(2076,-1925)
CANH: R1.2 Signal.13 TJA1050.7 | length 497.7
  Top Layer w10: R1.2@586,-1865.93 609.93,-1842 TJA1050.7@709.51,-1842 772,-1842 794,-1864 794,-2067.87 Signal.13@746.8,-2115.08
CANL: R1.1 Signal.12 TJA1050.6 | length 544.2
  Top Layer w10: R1.1@586,-1799 593,-1792 TJA1050.6@709.51,-1792 768,-1792 830,-1854 830,-2089.58 Signal.12@855.5,-2115.08
CANRX: STM32.70 TJA1050.4 | length 2103.3
  Top Layer w10: TJA1050.4@898.49,-1742 985,-1742 1026,-1701 v1(1092,-1701) ; v1(2232,-1346) 2359.04,-1346 2543.84,-1161.2 STM32.70@2725.21,-1161.2
  Bottom Layer w10: v1(1092,-1701) 1128,-1701 1171.5,-1744.5 1793.17,-1744.5 2191.67,-1346 v1(2232,-1346)
CANTX: STM32.71 TJA1050.1 | length 2185.6
  Top Layer w10: TJA1050.1@898.49,-1892 985,-1892 1026,-1851 1026,-1769 1040.5,-1754.5 1122.5,-1754.5 1177,-1700 v1(1199,-1700) ; v1(2234,-1289) 2392,-1289 2539.48,-1141.52 STM32.71@2725.21,-1141.52
  Bottom Layer w10: v1(1199,-1700) 1813.63,-1700 2224.63,-1289 v1(2234,-1289)
CAPTURE0: Signal.21 STM32.92 | length 3299
  Top Layer w10: v1(2347,-1212) 2347.5,-1211.5 2347.5,-1159.92 2347.26,-1159.68 STM32.92@2347.26,-999.79
  Bottom Layer w10: Signal.21@1235.95,-2226.89 1122.84,-2340 737.88,-2340 659.96,-2262.08 659.96,-2032.92 874.88,-1818 1815.83,-1818 2029.83,-1604 2254,-1604 2347,-1511 v1(2347,-1212)
CAPTURE1: Signal.20 STM32.93 | length 3441.6
  Top Layer w10: v1(2322,-1185) 2325.8,-1181.2 2325.8,-1001.57 STM32.93@2327.57,-999.79
  Bottom Layer w10: Signal.20@1344.65,-2226.89 1214.54,-2357 730.83,-2357 642.96,-2269.12 642.96,-2025.88 867.83,-1801 1808.79,-1801 2022.79,-1587 2246.96,-1587 2322,-1511.96 v1(2322,-1185)
CAPTURE2: Signal.19 STM32.95 | length 3581.9
  Top Layer w10: STM32.95@2288.2,-999.79 2289.98,-1001.57 2289.98,-1151.98 v1(2295,-1157)
  Bottom Layer w10: Signal.19@1453.35,-2226.89 1306.24,-2374 723.79,-2374 625.96,-2276.17 625.96,-2018.83 860.79,-1784 1801.75,-1784 2015.75,-1570 2239.92,-1570 2295,-1514.92 v1(2295,-1157)
CAPTURE3: Signal.18 STM32.96 | length 3719.3
  Top Layer w10: v1(2267,-1125) 2266.74,-1124.74 2266.74,-1001.57 STM32.96@2268.52,-999.79
  Bottom Layer w10: Signal.18@1562.05,-2226.89 1397.94,-2391 716.75,-2391 608.96,-2283.21 608.96,-2011.79 853.75,-1767 1794.71,-1767 2008.71,-1553 2232.88,-1553 2267,-1518.88 v1(2267,-1125)
CE: nRF.2 STM32.57 | length 1150.5
  Top Layer w10: STM32.57@2725.21,-1417.11 2926.89,-1417.11 2974,-1370 2974,-1340 3006,-1308 3052,-1308 3078.5,-1281.5 3078.5,-1008.46 3080,-1006.96 3080,-1006 3214.5,-871.5 3264.5,-871.5 3283,-853 nRF.2@3283,-708 nRF.2@3283,-672
CSN: nRF.3 STM32.56 | length 1243.8
  Top Layer w10: STM32.56@2725.21,-1436.8 2959.2,-1436.8 2992.5,-1403.5 3050.5,-1403.5 3095.5,-1358.5 3095.5,-1015.5 3221.96,-889.04 3317.96,-889.04 3333,-874 nRF.3@3333,-708 nRF.3@3333,-672